# Altium PCB PCB1修正取消布线.PcbDoc
Units mm, origin at the board's own origin, x right, y up, seen from the top; angles counter-clockwise.
Board outline 150 x 150 mm, 2 copper layers (Top Layer, Bottom Layer); 93 components, 93 nets, 298 pads, 31 vias.
Unrouted connection lines stored in the file: 6.
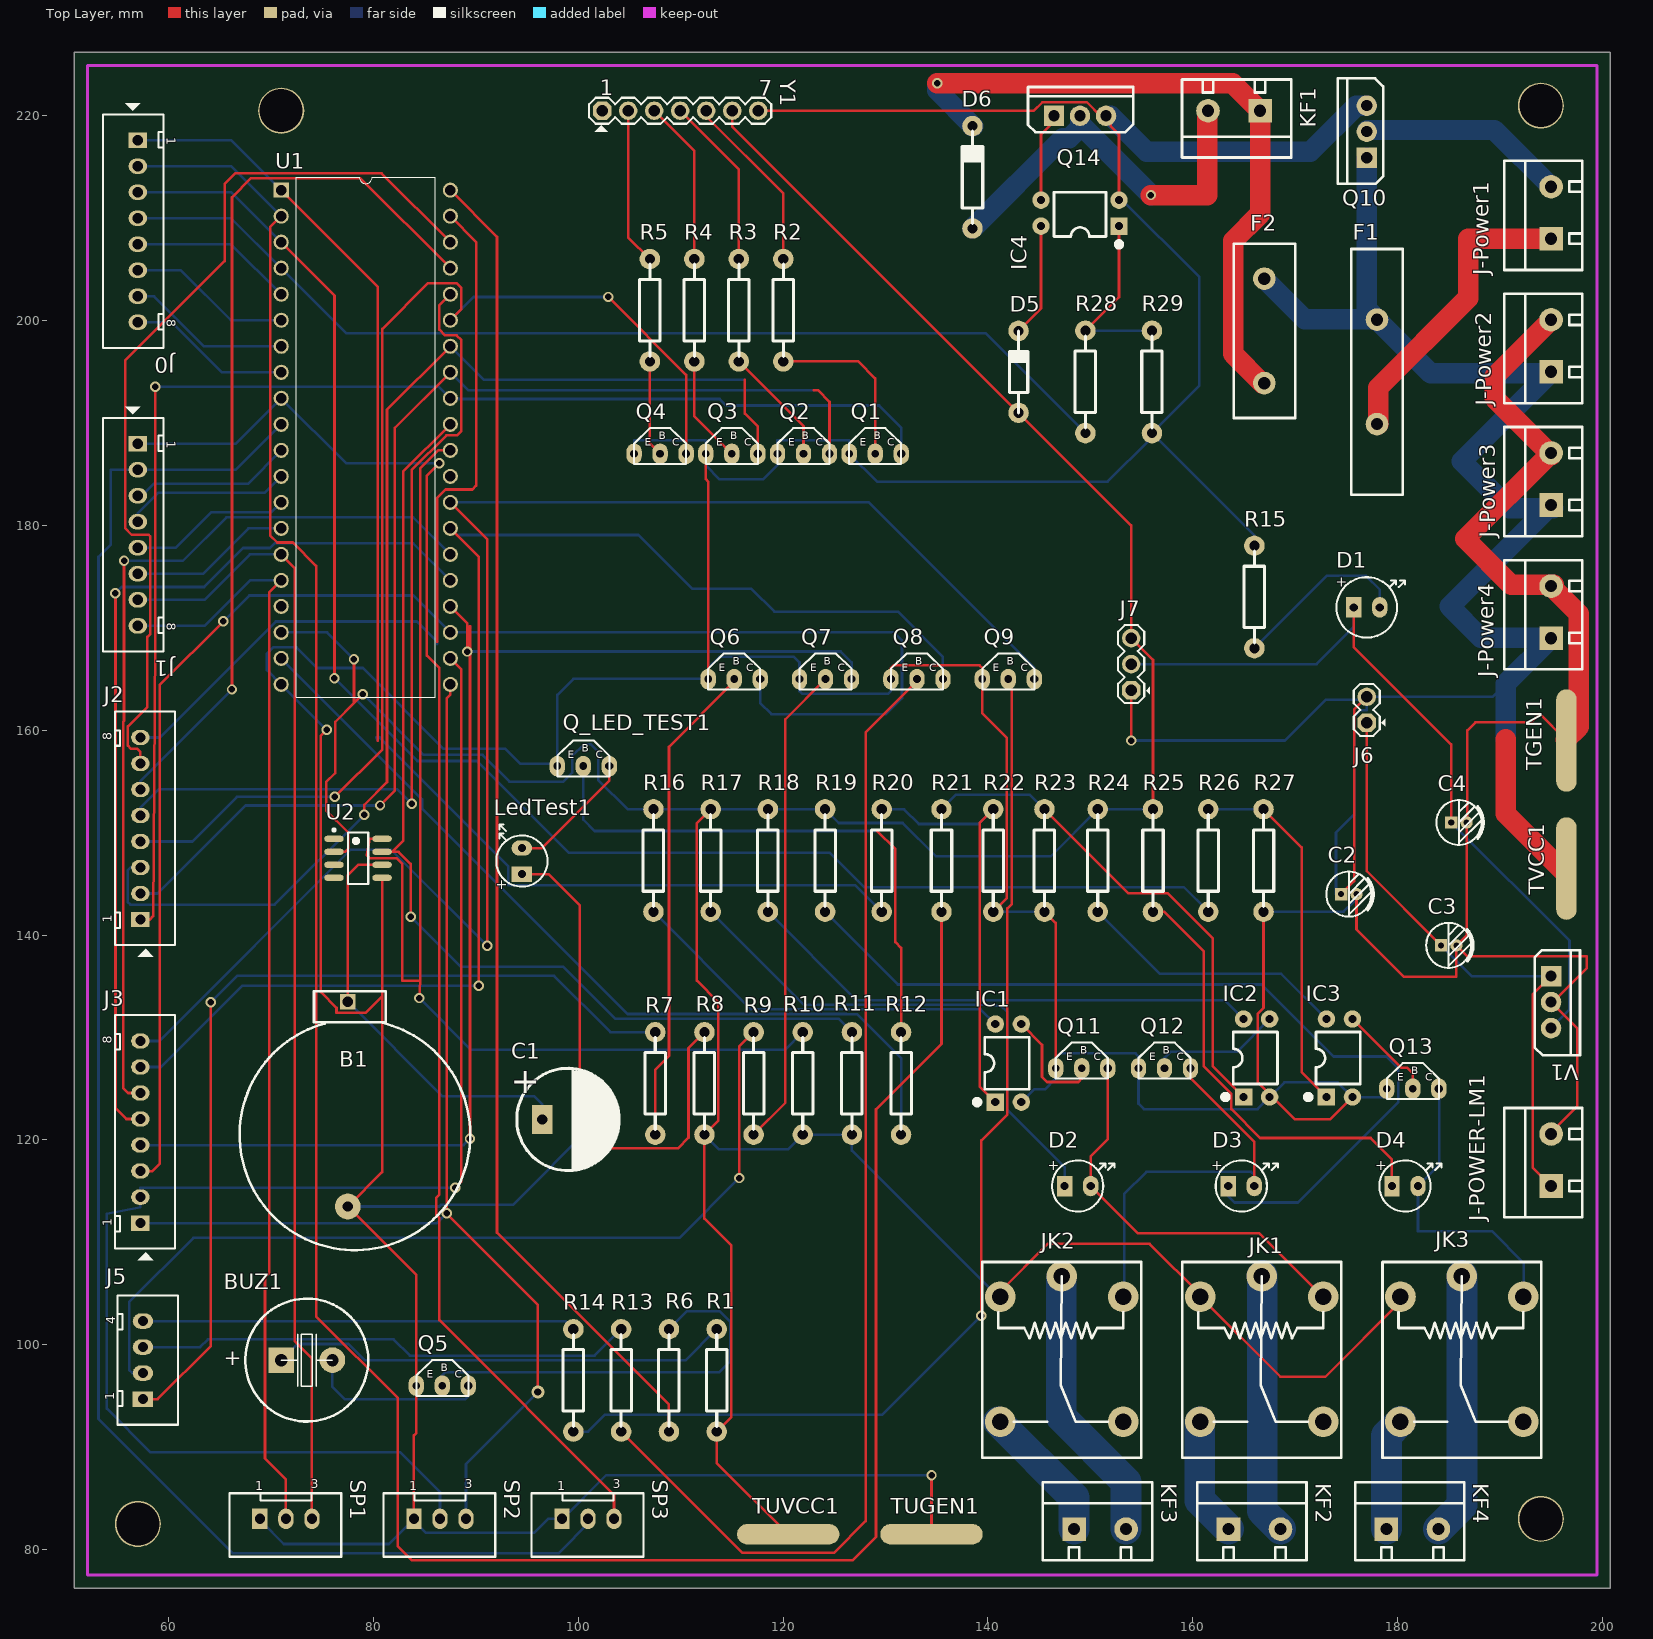
[diagram p0: Top Layer view]
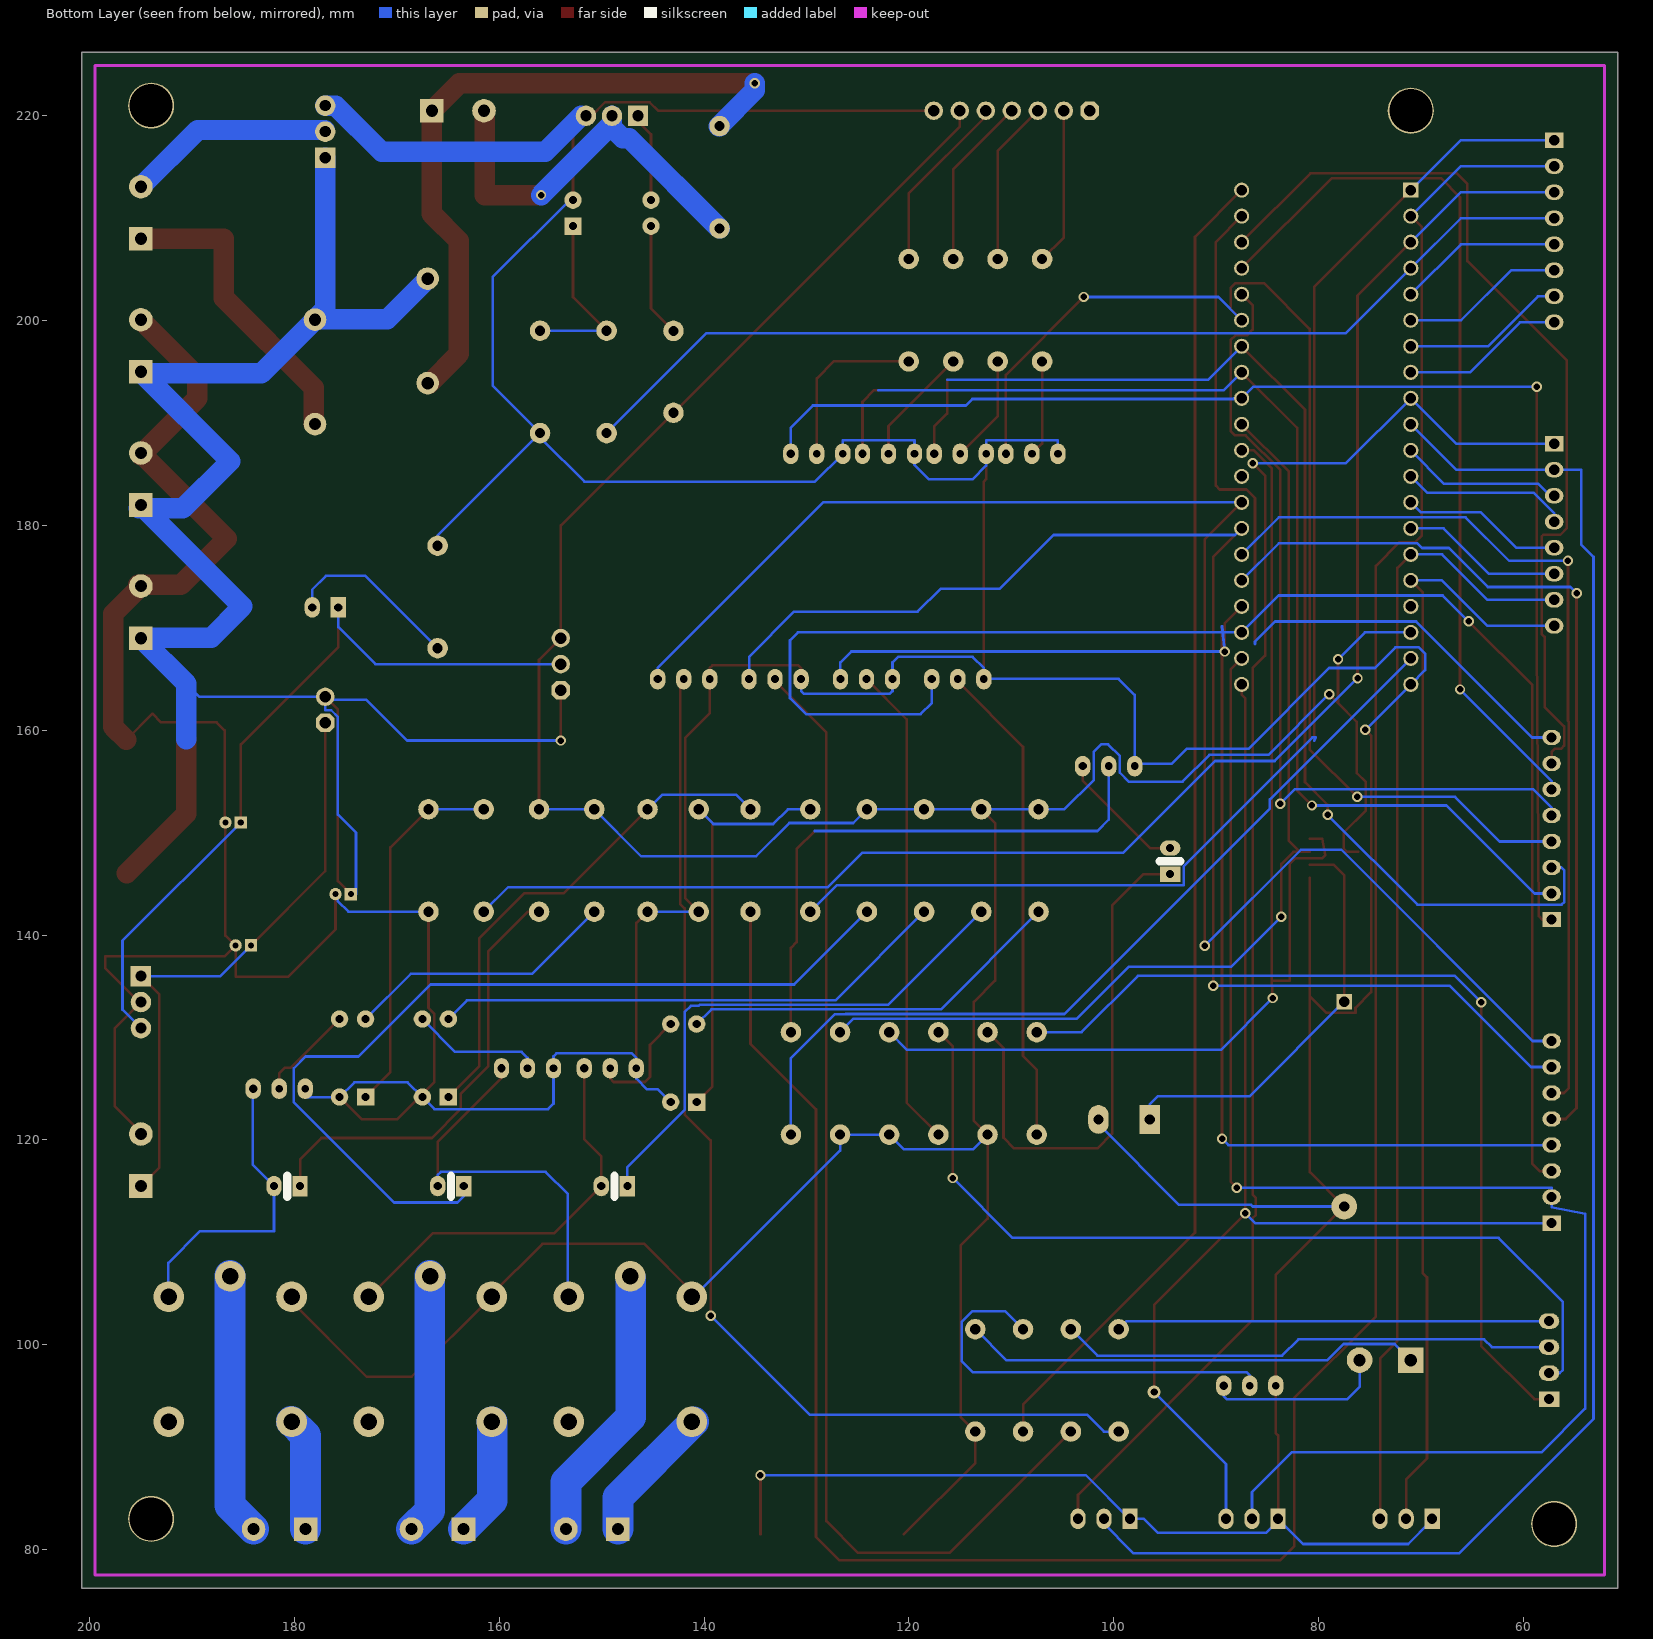
[diagram p1: Bottom Layer view, seen from below]

## Layer stack, top to bottom
Top Solder: solder mask 0.0102, Solder Resist, Dk 3.5
Top Layer: signal copper 0.0356
Dielectric 1: dielectric 0.32, FR-4, Dk 4.8
Bottom Layer: signal copper 0.0356
Bottom Solder: solder mask 0.0102, Solder Resist, Dk 3.5

## Board outline
50.8,76.2 200.8,76.2 200.8,226.2 50.8,226.2

## Design rules (kind name [scope] priority, off if disabled: settings)
Clearance [All] p1: gap=0.2
Height [All] p1: minheight=0 maxheight=55.4 prefheight=12.7
HoleSize [All] p1: absolutevalues=TRUE maxlimit=2.54 minlimit=0.4 maxpercent=80.000 minpercent=20.000
PolygonConnect [All] p1: connectstyle=Relief reliefconductorwidth=0.254 reliefentries=4 polygonreliefangle="90 Angle" airgapwidth=0.254
RoutingVias [All] p1: holewidth=0.635 width=1.016 viastyle="Through Hole" minholewidth=0.711 minwidth=1.27 maxholewidth=0.711 maxwidth=1.27
SMDNeckDown [All] p1: percent=50.000
SolderMaskExpansion [All] p1: expansion=0.102
Width VCC [InNetClass('VCC')] p1 off: maxlimit=3 minlimit=3 preferedwidth=3 minimp=50.000000 maximp=50.000000 favimp=50.000000
Width [All] p2: maxlimit=3 minlimit=0.254 preferedwidth=0.254 minimp=50.000000 maximp=50.000000 favimp=50.000000
28 further rules are at their usual default settings.

## Classes and differential pairs
net class P3BUS[0..7]: P3BUS0 P3BUS1 P3BUS2 P3BUS3 P3BUS4 P3BUS5 P3BUS6 P3BUS7
net class P2BUS[0..7]: P2BUS0 P2BUS1 P2BUS2 P2BUS3 P2BUS4 P2BUS5 P2BUS6 P2BUS7
net class P1BUS[0..7]: P1BUS0 P1BUS1 P1BUS2 P1BUS3 P1BUS4 P1BUS5 P1BUS6 P1BUS7
net class P0BUS[0..7]: P0BUS0 P0BUS1 P0BUS2 P0BUS3 P0BUS4 P0BUS5 P0BUS6 P0BUS7
component class U_电源: C2 C3 C4 D1 F1 J6 J7 J-Power1 J-Power2 J-Power3 J-Power4 J-POWER-LM1 Q10 R15 TGEN1 TVCC1 V1
component class U_电机控制盒: D5 D6 F2 IC4 KF1 Q14 R28 R29
component class U_功率开关: D2 D3 D4 IC1 IC2 IC3 JK1 JK2 JK3 KF2 KF3 KF4 Q11 Q12 Q13 R16 R17 R18 R19 R20 R21 R22 R23 R24 R25 R26 R27
component class U_STC15_U1: B1 BUZ1 C1 J0 J1 J2 J3 J5 LedTest1 Q1 Q2 Q3 Q4 Q5 Q6 Q7 Q8 Q9 Q_LED_TEST1 R1 R2 R3 R4 R5 R6 R7 R8 R9 R10 R11 R12 R13 R14 SP1 SP2 SP3 TUGEN1 TUVCC1 U1 U2 Y1

## Components (designator, comment, footprint, x,y, rotation, side; value= is the part's Value field where it differs from the comment)
B1 "CR2032" CR2032座 78.2,120.5 r90 top
BUZ1 "SD1209T5-A1" BUZ5-12-0R5-9MM 73.5,98.5 r0 top
C1 "104" CE5-6R5X5-1mm 99,122 r0 top
C2 "0.1uf" "CAP 1.5*4*8" 175.25,144 r0 top
C3 "0.33uf" "CAP 1.5*4*8" 185,139 r0 top
C4 "0.1uf" "CAP 1.5*4*8" 186,151 r0 top
D1 "333-2SYGD/S530-E2" LED2-D5R9X8R7 177,172 r0 top
D2 "C535A WJN CU0V0231" LED2-D5X5 148.77,115.5 r0 top
D3 "C535A WJN CU0V0231" LED2-D5X5 164.75,115.5 r0 top
D4 "C535A WJN CU0V0231" LED2-D5X5 180.73,115.5 r0 top
D5 "1N457" DO-35 143,191 r90 top
D6 "1N4007-E3/73" DO-41 138.5,209 r90 top
F1 "FUSE" FUSE-24R1X3RX29R7-TH 178,195 r90 top
F2 "R30-600" FUSE-16R5X3RX24R9-TH 167,199 r90 top
IC1 "817" DIP4-300 142,127.5 r90 top
IC2 "817" DIP4-300 166.249,128 r90 top
IC3 "817" DIP4-300 174.332,128 r90 top
IC4 "817" DIP4-300 149,210.5 r180 top
J0 "W7810811120AB" XH8P-2R54-TH 57,208.73 r270 top
J1 "W7810811120AB" XH8P-2R54-TH 57,179.089 r270 top
J2 "W7810811120AB" XH8P-2R54-TH 57.25,150.411 r90 top
J3 "W7810811120AB" XH8P-2R54-TH 57.25,120.77 r90 top
J5 "W7810411120AB" XH4P-2R54-TH 57.5,98.5 r90 top
J6 "PAS1251-0201A01B1BA" CON2P-2R54-TH 177,162 r90 top
J7 "PAS1251-0301A01B1BA" CON3P-2R54-TH 154,166.46 r90 top
J-Power1 "KF301-5.08-2p" KF301-5.0-2P 195,213.08 r90 top
J-Power2 "KF301-5.08-2p" KF301-5.0-2P 195,200.08 r90 top
J-Power3 "KF301-5.08-2p" KF301-5.0-2P 195,187.08 r90 top
J-Power4 "KF301-5.08-2p" KF301-5.0-2P 195,174.08 r90 top
J-POWER-LM1 "KF301-5.08-2p" KF301-5.0-2P 195,120.58 r90 top
JK1 "SRD-05VDC-SL-C" SRD-C_B 172.751,104.681 r270 top
JK2 "SRD-05VDC-SL-C" SRD-C_B 153.213,104.681 r270 top
JK3 "SRD-05VDC-SL-C" SRD-C_B 192.289,104.681 r270 top
KF1 "KF301-5.08-2p" KF301-5.0-2P 161.5,220.5 r180 top
KF2 "KF301-5.08-2p" KF301-5.0-2P 168.58,82 r0 top
KF3 "KF301-5.08-2p" KF301-5.0-2P 153.5,82 r0 top
KF4 "KF301-5.08-2p" KF301-5.0-2P 184,82 r0 top
LedTest1 "333-2SUBD/S400-A4" LED2-D5X5 94.5,147.23 r90 top
Q1 "2N3904" TO-92-3-EBC 129,187 r0 top
Q2 "2N3904" TO-92-3-EBC 122,187 r0 top
Q3 "2N3904" TO-92-3-EBC 115,187 r0 top
Q4 "2N3904" TO-92-3-EBC 108,187 r0 top
Q5 "2N3904" TO-92-3-EBC 86.73,96 r0 top
Q6 "2N3904" TO-92-3-EBC 115.23,165 r0 top
Q7 "2N3904" TO-92-3-EBC 124.153,165 r0 top
Q8 "2N3904" TO-92-3-EBC 133.077,165 r0 top
Q9 "2N3904" TO-92-3-EBC 142,165 r0 top
Q10 "IRF540" TO220A 177,218.46 r90 top
Q11 "2N3904" TO-92-3-EBC 149.168,127 r0 top
Q12 "2N3904" TO-92-3-EBC 157.251,127 r0 top
Q13 "2N3904" TO-92-3-EBC 181.5,125 r0 top
Q14 "IRFZ44" TO220A 149,220 r0 top
Q_LED_TEST1 "2N3904" TO-92-3-EBC 100.5,156.5 r0 top
R1 "166" RY0R25W 113.5,96.5 r90 top
R2 "100R" RY0R25W 120,201 r90 top
R3 "100R" RY0R25W 115.658,201 r90 top
R4 "100R" RY0R25W 111.315,201 r90 top
R5 "100R" RY0R25W 106.973,201 r90 top
R6 "1K" RY0R25W 108.833,96.5 r90 top
R7 "5.1K" RY0R25W 107.5,125.5 r90 top
R8 "250" RY0R25W 112.3,125.5 r90 top
R9 "5.1K" RY0R25W 117.1,125.5 r90 top
R10 "1.2k" RY0R25W 121.9,125.5 r90 top
R11 "1.2k" RY0R25W 126.7,125.5 r90 top
R12 "1.2k" RY0R25W 131.5,125.5 r90 top
R13 "5.1K" RY0R25W 104.167,96.5 r90 top
R14 "5.1K" RY0R25W 99.5,96.5 r90 top
R15 "250" RY0R25W 166,173 r90 top
R16 "1.2K" RY0R25W 107.319,147.264 r90 top
R17 "300" RY0R25W 112.907,147.264 r90 top
R18 "1.2K" RY0R25W 118.495,147.264 r90 top
R19 "300" RY0R25W 124.083,147.264 r90 top
R20 "1K" RY0R25W 129.607,147.264 r90 top
R21 "1K" RY0R25W 135.449,147.264 r90 top
R22 "400" RY0R25W 140.5,147.264 r90 top
R23 "400" RY0R25W 145.5,147.264 r90 top
R24 "1.2K" RY0R25W 150.702,147.264 r90 top
R25 "300" RY0R25W 156.1,147.264 r90 top
R26 "1K" RY0R25W 161.497,147.264 r90 top
R27 "400" RY0R25W 166.895,147.264 r90 top
R28 "1k" RY0R25W 149.5,194 r90 top
R29 "400" RY0R25W 156,194 r90 top
SP1 "" XH3P-2R54-TH 71.46,83 r0 top
SP2 "" XH3P-2R54-TH 86.5,83 r0 top
SP3 "" XH3P-2R54-TH 100.96,83 r0 top
TGEN1 "T？" 铺铜条#1 197.516,148.459 r90 top
TUGEN1 "T？" 铺铜条#2 135.516,70.959 r90 top
TUVCC1 "T？" 铺铜条#2 121.516,70.959 r90 top
TVCC1 "T？" 铺铜条#1 197.516,135.959 r90 top
U1 "STC15F2K60S2_PDIP40" DIP40 71,212.74 r0 top
U2 "DS3231MZ+" S8MK+1_L 78.5,147.5 r0 top
V1 "7805" TO220A 195,133.46 r270 top
Y1 "315接收模块" CON7P-2R54-TH 109.96,220.5 r0 top

## Footprints (in the part's own frame and the unit in brackets; to place one, negate y for a bottom-side part, rotate by r counter-clockwise, add the part's x,y. Pads: shape width x height; smd on the part's side, far side on the other; paste and mask are expansions set on the pad)
BUZ5-12-0R5-9MM [mm]
  rect 2.5x2.5 hole 1.2: 1(-2.5,0)
  round 2.5 hole 1.2: 2(2.5,0)
  silkscreen extent -6,-6 6,6, body extent -5.99,-6 6,6, height 9
"CAP 1.5*4*8" [mm] "脚距1.5mm直径4mm高度8mm"
  rect 1.2x1.2 hole 0.6: 1(-0.75,0)
  round 1.2 hole 0.6: 2(0.75,0)
  silkscreen extent -2.2,-2.2 2.41,2.2, body extent -2,-2 2.02,2, height 8.04
CE5-6R5X5-1mm [mm]
  rect 2x2.8 hole 1: 1(-2.5,0)
  oval 2x2.8 hole 1: 2(2.5,0)
  silkscreen extent -5,-5 5,5, body extent -4.99,-4.9 5,5.1, height 10
CON2P-2R54-TH [mm]
  oct 1.8x1.8 hole 1.1: 1(-1.27,0)
  round 1.8 hole 1.1: 2(1.27,0)
  silkscreen extent -2.54,-1.8 2.54,1.27, body extent -2.54,-1.27 2.54,1.27, height 9.39
CON3P-2R54-TH [mm]
  oct 1.8x1.8 hole 1.1: 1(-2.54,0)
  round 1.8 hole 1.1: 2(0,0) 3(2.54,0)
  silkscreen extent -3.81,-1.83 3.81,1.27, body extent -3.78,-1.27 3.84,1.27, height 1.53
CON7P-2R54-TH [mm]
  oct 1.8x1.8 hole 1.1: 1(-7.62,0)
  round 1.8 hole 1.1: 2(-5.08,0) 3(-2.54,0) 4(0,0) 5(2.54,0) 6(5.08,0) 7(7.62,0)
  silkscreen extent -8.89,-2.04 8.89,1.27, body extent -8.86,-1.27 8.92,1.27, height 8.97
CR2032座 [mm]
  rect 1.524x1.524 hole 1: 0(13,0.7)
  round 2.524 hole 1: 1(-7,0.7)
  silkscreen extent -11.26,-11.26 14,11.26
DIP4-300 [mm] "4.6*7.6*3.8(长宽高）"
  rect 1.7x1.7 hole 0.8: 1(-3.81,1.27)
  round 1.7 hole 0.8: 2(-3.81,-1.27) 3(3.81,-1.27) 4(3.81,1.27)
  silkscreen extent -4.06,-2.03 2.54,3.3, body extent -3.93,-2.29 3.94,2.29, height 4.5
DIP40 [mil]
  rect 58x58 hole 40: 1(0,0)
  round 58 hole 40: 2(0,-100) 3(0,-200) 4(0,-300) 5(0,-400) 6(0,-500) 7(0,-600) 8(0,-700) 9(0,-800) 10(0,-900) 11(0,-1000) 12(0,-1100) 13(0,-1200) 14(0,-1300) 15(0,-1400) 16(0,-1500) 17(0,-1600) 18(0,-1700) 19(0,-1800) 20(0,-1900) 21(650,-1900) 22(650,-1800) 23(650,-1700) 24(650,-1600) 25(650,-1500) 26(650,-1400) 27(650,-1300) 28(650,-1200) 29(650,-1100) 30(650,-1000) 31(650,-900) 32(650,-800) 33(650,-700) 34(650,-600) 35(650,-500) 36(650,-400) 37(650,-300) 38(650,-200) 39(650,-100) 40(650,0)
  silkscreen extent 58,-1950 592,50
DO-35 [mm]
  round 2 hole 1: 1(0,0) 2(8,0)
  silkscreen extent 0,-0.9 8,0.9, body extent -0.3,-0.97 8.3,1.02, height 1.99
DO-41 [mm]
  round 2 hole 1: 1(0,0) 2(10,0)
  silkscreen extent 0.5,-1 9.5,1, body extent -0.53,-1.3 10.53,1.3, height 2.8
FUSE-16R5X3RX24R9-TH [mm]
  round 2.2 hole 1.2: 1(-5.1,0) 2(5.1,0)
  silkscreen extent -8.5,-3 8.5,3, body extent -10.12,-1.8 11.18,1.3, height 25.65
FUSE-24R1X3RX29R7-TH [mm]
  round 2.2 hole 1.2: 1(-5.1,0) 2(5.1,0)
  silkscreen extent -12,-2.5 12,2.5, body extent -10.76,-1.45 10.54,1.65, height 25.65
KF301-5.0-2P [mm] "可拼接端子/6A"
  rect 2.3x2.3 hole 1.2: 1(-5.08,0)
  round 2.3 hole 1.2: 2(0,0)
  silkscreen extent -8.13,-3.05 2.54,4.57, body extent -7.95,-3 2.55,4.6, height 10.05
LED2-D5R9X8R7 [mm]
  rect 1.5x2 hole 0.8: 1(-1.27,0)
  oval 1.5x2 hole 0.8: 2(1.27,0)
  silkscreen extent -2.95,-2.95 3.75,2.95, body extent -3,-3 2.88,2.89, height 8.7
LED2-D5X5 [mm]
  rect 1.5x2 hole 0.8: 1(-1.27,0)
  oval 1.5x2 hole 0.8: 2(1.27,0)
  silkscreen extent -2.5,-2.5 3.59,2.5, body extent -3,-3 2.98,2.99, height 14.5
RY0R25W [mm]
  round 2 hole 1: 1(-4.98,-0.027) 2(5.02,-0.027)
  silkscreen extent -4.48,-1.03 4.52,0.97, body extent -5.38,-1.11 5.38,1.2, height 2.43
S8MK+1_L [mm] "SOIC, 8-Leads, Body 4.9x3.9mm, Pitch 1.27mm, IPC High Density"
  oval 1.9x0.6 smd: 1(-2.35,1.905) 2(-2.35,0.635) 3(-2.35,-0.635) 4(-2.35,-1.905) 5(2.35,-1.905) 6(2.35,-0.635) 7(2.35,0.635) 8(2.35,1.905)
  silkscreen extent -2.47,-2.5 1,2.88, body extent -2,-2.5 2,2.5, height 1.75
SRD-C_B [mm] "单刀双投"
  round 3 hole 1.6: 1(0,0) 2(0,-12) 3(-2,-6) 4(12.2,0) 5(12.2,-12)
  silkscreen extent -3.4,-13.75 15.7,1.75, body extent -3.4,-13.75 15.7,1.75, height 15.6
TO220A [mm] "220，3脚晶体管"
  rect 2x2 hole 1.1: 1(-2.54,0)
  round 2 hole 1.1: 2(0,0) 3(2.54,0)
  silkscreen extent -5.08,-1.6 5.21,2.82, body extent -5.15,-1.53 5.15,2.9, height 18.5
TO-92-3-EBC [mm]
  oval 1.5x2 hole 0.762: B(0,0) E(-2.54,0)
  oval 1.5x2 hole 0.8: C(2.54,0)
  silkscreen extent -2.54,-1 2.54,2.5, body extent -3.1,-1.02 3.07,3.06, height 8.5
XH3P-2R54-TH [mm]
  rect 1.5x2 hole 1: 1(-2.54,0)
  oval 1.5x2 hole 1: 2(0,0) 3(2.54,0)
  silkscreen extent -5.5,-3.7 5.4,2.5, body extent -5.31,-3.6 5.29,2.4, height 7.5
XH4P-2R54-TH [mm]
  rect 1.5x2 hole 1: 1(-3.81,0)
  oval 1.5x2 hole 1: 2(-1.27,0) 3(1.27,0) 4(3.81,0)
  silkscreen extent -6.31,-3.4 6.29,2.5, body extent -6.47,-3.4 6.63,2.6, height 7.5
XH8P-2R54-TH [mm]
  rect 1.5x1.8 hole 1: 1(-8.89,0)
  oval 1.5x1.8 hole 1: 2(-6.35,0) 3(-3.81,0) 4(-1.27,0) 5(1.27,0) 6(3.81,0) 7(6.35,0) 8(8.89,0)
  silkscreen extent -12.5,-3.4 11.41,2.5, body extent -11.56,-3.6 11.54,2.4, height 7.5
铺铜条#1 [mm]
  oval 10x2 smd: 1(10.541,1.016)
铺铜条#2 [mm]
  oval 2x10 smd: 1(10.541,1.016)

## Part data
BUZ1: library part 102BA-00004OD.01, "DIP,12x9mm,额定电压DC5V,频率2048Hz,黑色,间距5mm"
C1 C2 C3 C4: library part 102CB-00002OD.01, "DIP,电容量681pf,额定电压2000V,偏差±10%,6.5X5mm"
D1: library part 102DL-00010CH.01, "DIP,封装/间距直径5/2.54mm,额定电压2V,亮度普亮,绿色"
D2 D3 D4: library part 102DL-00002DG.01, "DIP,封装/间距直径5/2.54mm,额定电压3.2V,亮度高亮,白色"
D5: library part 102DG-00002AI.01, "DIP,D0-35,额定电压70V,电流200mA"
D6: library part 102DG-00002BS.01, "DIP,DO-41,额定电压1000V,电流1A"
F1: library part 102FP-00037BI.01, "DIP,24.1x29.7x3.0mm,额定电压30V,额定电流9A,触发电流18A,中速断"
F2: library part 102FP-00034BI.01, "DIP,16.5x24.9x3.0mm,额定电压30V,额定电流6A,触发电流12A,中速断"
IC1 IC2 IC3 IC4: "线性光耦"
J0 J1 J2 J3: library part 102NB-00026CY.01, "DIP,座子,封装脚距2.54mm,180度,1x8PIN,塑高/针长7.0/3.40mm,白色"
J5: library part 102NB-00025CY.01, "DIP,座子,封装脚距2.54mm,180度,1x4PIN,塑高/针长7.0/3.40mm,白色"
J6: library part 102NL-00005DJ.01, "DIP,封装脚距2.54mm,180度,1x2PIN,上针/下针6.0/3.0mm,黑色"
J7: library part 102NL-00001DJ.01, "DIP,封装脚距2.54mm,180度,1x3PIN,黑色"
J-Power1 J-Power2 J-Power3 J-Power4 J-POWER-LM1 KF1 KF2 KF3 KF4: library part KF301
JK1 JK2 JK3: "5V一组转换"
LedTest1: library part 102DL-00029CH.01, "DIP,封装/间距直径5/2.54mm,额定电压3.3V,亮度高亮,蓝色"
Q1 Q2 Q3 Q4 Q5 Q6 Q7 Q8 Q9 Q11 Q12 Q13 Q_LED_TEST1: library part 102GN-00009BA.01, "DIP,封装形式TO-92-3,耐压值40V,额定电流200mA,耗散功率625mW"
Q10 Q14: library part IRF840, "N沟场效应管"
R1 R6: library part 102RO-00079BW.01, "DIP,阻值1K,精度±5%,9.0x3.3mm,额定功率1/2W"
R2 R3 R4 R5: library part 102RO-00040BS.01, "DIP,阻值100R,精度±1%,6.1x2.29mm,额定功率1/4W"
R7 R9 R13 R14: library part 102RO-00048BS.01, "DIP,阻值5.1K,精度±1%,6.2x2.29mm,额定功率1/4W"
R8 R10 R11 R12: library part 102RO-00036BS.01, "DIP,阻值8.2R,精度±1%,AXIAL0.4,额定功率1/2W"
R15: library part 102RO-00087BS.01, "DIP,阻值500R,精度±0.1%,4.75x1.65mm,额定功率1/4W"
R16 R17 R18 R19 R20 R21 R22 R23 R24 R25 R26 R27: library part 102RO-00085BW.01, "DIP,阻值1K,精度±0.1%,AXIAL0.4,额定功率1/4W"
R28 R29: library part 102RO-00018BW.01, "DIP,阻值1M,精度±1%,AXIAL0.4,额定功率1/4W"
SP1 SP2 SP3: library part 102NB-00017CY.01, "DIP,座子,封装脚距2.54mm,180度,1x3PIN,塑高/针长7.0/3.40mm,白色"
TGEN1 TUGEN1 TUVCC1 TVCC1: library part 铺铜条, "2mm*20的铜条用于焊接"
U2: "+/-5ppm, MEMS based Real-Time Clock, I2C Interface, 8-Pin SO, -40 to 85 degC, Pb-Free"
V1: library part 78xx, "线性稳压芯片"
Y1: library part 102NL-00032BV.01, "DIP,封装脚距2.54mm,180度,1x7PIN,黑色"

## Free pads (board coordinates)
  round 4.5 hole 4.2 unplated: 0(57,82.5) 1(71,220.5) 2(194,221) 3(194,83)

## Via types
v1: diameter 1.016, hole 0.635, Top Layer to Bottom Layer, 30 vias
v2: diameter 1.27, hole 0.711, Top Layer to Bottom Layer, 1 vias

## Nets (pads, with @x,y where several pads share a name; then routed paths per layer and width w, separated by ;. In a path a pad name is that pad's centre, name@x,y a point inside that pad or via, vN(x,y) a via of type N, cw(c..) or ccw(c..) an arc to the next point about the centre after c; other vN are vias at no path point)
CLOCK_CLO: R10.2 U1.30 U2.8 | length 115.5
  Top Layer w0.254: U2.8 79.657,149.405 79.35,147.828 79.68,147.498 82.296,147.498 82.807,146.987 82.807,135.531 84.591,135.531 ; v1(84.48,133.858) 84.591,135.531 ; U1.30 86.324,187.34 84.591,185.607 84.591,135.531
  Bottom Layer w0.254: v1(84.48,133.858) 89.535,128.803 120.21,128.803 R10.2
CLOCK_IO: R11.2 U1.31 U2.7 | length 100.3
  Top Layer w0.254: U2.7 81.841,148.135 ; v1(83.642,141.808) 83.642,146.941 82.448,148.135 81.841,148.135 ; U1.31 82.909,185.279 82.909,149.203 81.841,148.135
  Bottom Layer w0.254: v1(83.642,141.808) 88.544,136.906 98.552,136.906 103.611,131.847 125.4,131.847 R11.2
GND: B1.1 C1.2 C2.2 C3.2 C4.2 IC1.2 IC2.2 IC3.2 IC4.2 J-Power2.2 J-Power3.2 J-Power4.2 J-POWER-LM1.2 Q1.E Q2.E Q3.E Q4.E Q5.E Q6.E Q7.E Q8.E Q9.E Q10.3 Q11.E Q12.E Q13.E Q14.3 Q_LED_TEST1.E R15.2 R22.1 R23.1 R27.1 R29.1 SP1.1 SP2.1 SP3.1 TGEN1.1 TUGEN1.1 U1.20 U2.5 V1.2 Y1.7 | length 775.6
  Top Layer w0.254: v1(75.438,160.042) 74.873,159.477 74.873,134.423 76.403,132.893 76.403,132.41 79.248,132.41 80.848,134.01 ; U2.5 80.848,145.595 80.848,134.01 ; SP2.1 83.96,91.134 84.19,91.364 Q5.E 84.19,106.81 B1.1 80.848,116.848 80.848,134.01 ; Q3.E 112.46,184.517 112.69,184.287 Q6.E ; Y1.7 144.498,220.5 145.325,221.327 149.673,221.327 Q14.3@151,220 ; Q8.E 130.537,166.071 130.81,166.345 139.192,166.345 139.46,166.077 Q9.E 139.46,161.646 141.859,159.247 141.859,143.616 R22.1 ; TUGEN1.1 v1(134.5,87.256) ; R23.1 146.628,141.183 Q11.E ; Q14.3@152,220 152,219 152.81,218.19 IC4.2 ; R27.1 166.922,132.878 166.342,132.298 166.342,125.658 170,122 173.412,122 IC3.2 ; C2.2@175.997,143.84 175.997,140.564 180.645,135.915 185.75,135.915 C3.2 186.828,137.922 198.501,137.922 198.501,136.804 V1.2@195.078,133.382 ; C3.2@185.776,138.989 186.75,139.963 C4.2 ; C4.2@186.817,151.232 186.817,159.995 187.604,160.782 193.042,160.782 193.88,161.62 TGEN1.1@196.432,159.068 ; V1.2 V1.2@195.078,133.382 ; J-POWER-LM1.2@195.199,120.929 197.561,123.292 197.561,130.899 V1.2@195.078,133.382
  Top Layer w2: J-Power4.2 197.688,171.392 197.688,160.325 TGEN1.1@196.432,159.068 ; J-Power3.2 J-Power3.2@194.905,186.984 ; J-Power2.2 189.484,194.564 189.484,192.405 J-Power3.2@194.905,186.984 ; J-Power3.2@195.021,186.868 J-Power3.2@194.905,186.984 ; J-Power4.2@195.275,174.193 191.114,174.193 186.614,178.694 J-Power3.2@194.905,186.984
  Bottom Layer w0.254: SP1.1@69.063,82.728 71.247,80.543 81.503,80.543 SP2.1 SP2.1@83.96,82.816 ; v1(75.438,160.042) U1.20 69.596,165.884 69.596,167.488 70.206,168.097 72.492,168.097 74.507,166.082 78.978,166.082 86.868,158.191 92.888,158.191 94.336,156.743 Q_LED_TEST1.E@97.96,156.743 ; B1.1 86.436,113.5 86.6,113.664 93.624,113.664 101.5,121.541 C1.2 ; SP2.1@83.947,82.829 SP2.1@83.96,82.816 ; Q_LED_TEST1.E Q_LED_TEST1.E@97.96,156.743 ; SP3.1 97.072,83 95.707,81.636 85.141,81.636 SP2.1@83.96,82.816 ; SP3.1@98.425,82.956 102.725,87.256 v1(134.5,87.256) ; Q4.E 105.46,188.341 112.46,188.341 Q3.E 112.46,185.838 113.792,184.506 118.038,184.506 119.46,185.928 Q2.E 119.46,188.341 126.46,188.341 Q1.E 129.184,184.276 151.687,184.276 155.829,188.417 R29.1@155.829,188.951 ; Q6.E Q6.E@112.69,165.024 ; Q8.E 130.537,163.83 130.283,163.576 121.867,163.576 121.613,163.83 Q7.E 121.613,166.626 121.066,167.173 113.792,167.173 112.69,166.071 Q6.E@112.69,165.024 ; R22.1 R23.1 ; IC1.2 144.526,124.946 145.59,124.946 146.628,125.984 Q11.E 146.628,128.016 147.06,128.448 154.432,128.448 154.711,128.168 Q12.E 154.711,123.546 155.245,123.012 166.341,123.012 IC2.2 168.957,125.628 174.163,125.628 IC3.2 175.602,124.181 178.96,124.181 Q13.E ; IC4.2@153.01,211.887 160.655,204.241 160.655,193.648 R29.1 R29.1@156.179,188.868 ; R29.1@156.362,189.052 R29.1@156.179,188.868 ; R15.2 165.989,177.902 165.989,179.058 R29.1@156.179,188.868 ; R27.1 174.752,142.284 175.768,143.3 C2.2@175.768,143.662 ; C2.2@175.92,143.815 C2.2@175.768,143.662 ; C2.2 175.768,143.768 C2.2@175.768,143.662 ; Q_LED_TEST1.E@97.96,156.743 97.96,163.449 99.535,165.024 Q6.E@112.69,165.024
  Bottom Layer w2: Q14.3@152,220 151.994,220.015 155.524,216.484 171.501,216.484 175.997,220.98 176.98,220.98 Q10.3
NetB1_0: B1.0 C1.1 U2.6 | length 40.7
  Top Layer w0.254: B1.0 77.5,145.854 78.511,146.865 U2.6
  Bottom Layer w0.254: B1.0 86.718,124.282 95.662,124.282 96.5,123.444 C1.1
NetBUZ1_1: BUZ1.1 R1.2 | length 45.1
  Bottom Layer w0.254: BUZ1.1 72.577,100.077 77.572,100.077 79.173,98.476 110.483,98.476 R1.2
NetBUZ1_2: BUZ1.2 Q5.C | length 17.5
  Bottom Layer w0.254: BUZ1.2 76,95.882 77.216,94.666 88.94,94.666 89.27,94.996 Q5.C
NetC3_1: C3.1 J6.1 J-POWER-LM1.1 V1.1 | length 58.7
  Top Layer w0.254: J6.1 177,146.25 C3.1 ; J-POWER-LM1.1 193.192,117.308 193.192,134.192 V1.1
  Bottom Layer w0.254: C3.1 187.25,136 V1.1
NetD1_2: D1.2 R15.1 | length 17.5
  Bottom Layer w0.254: R15.1 173.089,175.082 176.924,175.082 178.27,173.736 D1.2
NetD2_1: D2.1 R17.1 | length 52.4
  Bottom Layer w0.254: R17.1 122.009,133.209 129.625,133.209 129.642,133.192 138.82,133.192 138.836,133.209 140.425,133.209 140.538,133.096 141.3,133.096 141.91,132.486 141.91,122.936 147.5,117.346 D2.1
NetD2_2: D2.2 JK1.1 Q11.C | length 39.5
  Top Layer w0.254: Q11.C 151.708,120.06 150.04,118.392 D2.2 154.669,110.871 166.522,110.871 JK1.1@172.847,104.546
NetD3_1: D3.1 R19.1 | length 87.5
  Bottom Layer w0.254: R19.1 131.215,135.179 166.726,135.179 173.761,128.143 178.918,128.143 180.061,127 180.061,123.673 170.282,113.894 164.084,113.894 163.48,114.498 D3.1
NetD3_2: D3.2 JK2.1 Q12.C | length 38.7
  Top Layer w0.254: Q12.C 159.791,126.047 166.02,119.819 D3.2
  Bottom Layer w0.254: JK2.1@153.314,104.927 153.314,114.732 155.473,116.891 165.715,116.891 166.02,116.586 D3.2
NetD4_1: D4.1 R25.1 | length 43.4
  Top Layer w0.254: R25.1 157.201,142.284 161.087,138.398 161.087,127.178 163.779,124.485 163.779,123.012 166.599,120.193 177.377,120.193 179.46,118.11 D4.1
NetD4_2: D4.2 JK3.1 Q13.C | length 29.5
  Bottom Layer w0.254: Q13.C 184.074,125.044 184.074,117.574 D4.2 182,111.091 189.239,111.091 192.329,108.001 JK3.1@192.329,104.978
NetD5_2: D5.2 IC4.4 | length 11.1
  Top Layer w0.254: D5.2 145.19,201.19 IC4.4
NetD6_1: D6.1 KF1.2 Q14.2 | length 39.1
  Top Layer w2: v1(155.931,212.268) 161.442,212.268 161.442,220.32 KF1.2@161.493,220.37
  Bottom Layer w2: D6.1 147.3,217.8 147.957,217.8 149.047,218.89 Q14.2@149.047,219.151 ; Q14.2 149,219.198 Q14.2@149.047,219.151 ; v1(155.931,212.268) Q14.2@149.047,219.151
NetD6_2: D6.2 F2.1 KF1.1 | length 67.2
  Top Layer w2: v1(135.052,223.164) 163.916,223.164 KF1.1 166.58,210.42 163.957,207.797 163.957,196.748 F2.1@166.853,193.853
  Bottom Layer w2: v1(135.052,223.164) 135.052,222.504 138.557,218.999 D6.2
NetF1_1: F1.1 J-Power1.1 | length 29.9
  Top Layer w2: F1.1@178.13,189.865 178.13,193.446 186.893,202.209 186.893,208 J-Power1.1
NetIC1_1: IC1.1 R20.2 R22.2 | length 41.9
  Top Layer w0.254: R22.2 139.192,150.949 139.192,125.228 IC1.1
  Bottom Layer w0.254: R20.2 131.826,152.284 133.259,150.851 139.094,150.851 R22.2
NetIC1_3: IC1.3 Q11.B | length 11.2
  Top Layer w0.254: IC1.3 145.288,129.292 145.288,126.162 145.796,125.654 148.844,125.654 149.168,125.978 Q11.B
NetIC1_4: IC1.4 R16.1 | length 37.9
  Bottom Layer w0.254: R16.1 116.875,132.755 139.285,132.755 IC1.4
NetIC2_1: IC2.1 R21.2 R23.2 | length 49.6
  Top Layer w0.254: R23.2 153.742,144.069 157.582,144.069 161.95,139.7 161.95,127.218 IC2.1
  Bottom Layer w0.254: R21.2 136.913,153.721 144.09,153.721 R23.2
NetIC2_3: IC2.3 Q12.B | length 12.9
  Bottom Layer w0.254: Q12.B 157.251,128.016 157.836,128.6 164.309,128.6 IC2.3
NetIC2_4: IC2.4 R18.1 | length 50.8
  Bottom Layer w0.254: R18.1 127.177,133.629 163.159,133.629 IC2.4
NetIC3_1: IC3.1 R26.2 R27.2 | length 36
  Top Layer w0.254: R27.2 170.637,148.569 170.637,126.614 IC3.1
  Bottom Layer w0.254: R26.2 R27.2
NetIC3_3: IC3.3 Q13.B | length 9.6
  Top Layer w0.254: IC3.3 180.361,127.051 180.941,127.051 181.5,126.492 Q13.B
NetIC3_4: IC3.4 R24.1 | length 26.7
  Bottom Layer w0.254: R24.1 156.793,136.22 168.651,136.22 IC3.4
NetIC4_1: IC4.1 R28.2 R29.2 | length 18.1
  Top Layer w0.254: R28.2 152.81,202.303 IC4.1
  Bottom Layer w0.254: R28.2 R29.2
NetIC4_3: IC4.3 Q14.1 | length 9
  Top Layer w0.254: IC4.3 145.19,218.19 Q14.1@147,220
NetJ5_1: J5.1 R7.2 | length 89.1
  Top Layer w0.254: J5.1 58.928,94.69 64.135,99.897 v1(64.135,133.452)
  Bottom Layer w0.254: v1(64.135,133.452) 66.7,136.017 97.638,136.017 103.135,130.52 R7.2
NetJ5_2: J5.2 R9.2 | length 87.5
  Top Layer w0.254: v1(115.722,116.281) 115.722,129.115 R9.2
  Bottom Layer w0.254: J5.2 56.465,97.23 56.159,97.536 56.159,104.165 62.433,110.439 109.88,110.439 v1(115.722,116.281)
NetJ5_3: J5.3 R13.2 | length 48.7
  Bottom Layer w0.254: J5.3 63.067,99.77 63.828,100.531 81.968,100.531 83.566,98.933 101.607,98.933 R13.2
NetJ5_4: J5.4 R14.2 | length 42.4
  Bottom Layer w0.254: J5.4 98.737,102.31 R14.2
NetJ-Power1_2: J-Power1.2 Q10.2 | length 20.3
  Bottom Layer w2: Q10.2@177.038,218.618 189.462,218.618 J-Power1.2
NetJK1_3: JK1.3 KF2.2 | length 25.6
  Bottom Layer w3: JK1.3 166.802,106.782 166.802,83.778 KF2.2
NetJK1_5: JK1.5 KF2.1 | length 11.7
  Bottom Layer w3: JK1.5 160.706,92.456 160.706,84.794 KF2.1
NetJK2_3: JK2.3 KF3.2 | length 27.1
  Bottom Layer w3: JK2.3@147.168,106.477 147.168,92.939 153.5,86.606 KF3.2
NetJK2_5: JK2.5 KF3.1 | length 13.5
  Bottom Layer w3: JK2.5@141.021,92.481 148.42,85.082 KF3.1
NetJK3_3: JK3.3 KF4.2 | length 25.8
  Bottom Layer w3: KF4.2 186.309,84.309 186.309,106.756 JK3.3
NetJK3_5: JK3.5 KF4.1 | length 11.2
  Bottom Layer w3: KF4.1 178.92,91.138 180.315,92.532 JK3.5
NetLedTest1_1: LedTest1.1 R8.2 | length 51.8
  Top Layer w0.254: LedTest1.1 97.079,145.96 100.152,142.887 100.152,120.625 101.6,119.177 109.728,119.177 110.769,120.218 110.769,128.962 R8.2
NetLedTest1_2: LedTest1.2 Q_LED_TEST1.C | length 12.7
  Top Layer w0.254: LedTest1.2 96.455,148.5 103.04,155.085 Q_LED_TEST1.C
NetQ1_B: Q1.B R2.1 | length 17
  Top Layer w0.254: R2.1 127.356,196.02 129,194.376 Q1.B
NetQ2_B: Q2.B R3.1 | length 11.6
  Top Layer w0.254: R3.1 122,189.705 Q2.B
NetQ3_B: Q3.B R4.1 | length 10.5
  Top Layer w0.254: R4.1 111.342,190.658 Q3.B
NetQ4_B: Q4.B R5.1 | length 9.4
  Top Layer w0.254: R5.1 107,188 Q4.B
NetQ5_B: Q5.B R6.2 | length 40.7
  Bottom Layer w0.254: Q5.B 86.73,97.028 87.035,97.333 113.792,97.333 114.859,98.4 114.859,102.21 113.792,103.276 110.617,103.276 R6.2
NetQ6_B: Q6.B R7.1 | length 47.7
  Top Layer w0.254: R7.1 107.527,126.856 108.864,128.194 108.864,158.379 115.23,164.744 Q6.B
NetQ7_B: Q7.B R9.1 | length 47.4
  Top Layer w0.254: R9.1 120.218,123.611 120.218,161.065 Q7.B
NetQ8_B: Q8.B R13.1 | length 114.4
  Top Layer w0.254: R13.1 116.034,79.68 124.968,79.68 128.067,82.779 128.067,159.786 133.077,164.796 Q8.B
NetQ9_B: Q9.B R14.1 | length 108
  Top Layer w0.254: v1(139.37,102.845) 139.37,119.964 141.91,122.504 141.91,142.596 142.316,143.002 142.316,164.428 142,164.744 Q9.B
  Bottom Layer w0.254: R14.1 100.969,91.52 102.616,93.167 129.692,93.167 v1(139.37,102.845)
NetQ_LED_TEST1_B: Q_LED_TEST1.B R12.2 | length 55
  Top Layer w0.254: 129.184,150.165 130.962,148.387 130.962,139.319 131.527,138.754 R12.2
  Bottom Layer w0.254: Q_LED_TEST1.B 100.5,151.265 101.6,150.165 129.184,150.165
NetR2_2: R2.2 Y1.5 | length 17.6
  Top Layer w0.254: Y1.5 112.5,219.961 120.027,212.434 R2.2
NetR3_2: R3.2 Y1.4 | length 16.9
  Top Layer w0.254: Y1.4 115.685,214.775 R3.2
NetR4_2: R4.2 Y1.3 | length 16.1
  Top Layer w0.254: Y1.3 111.342,216.578 R4.2
NetR5_2: R5.2 Y1.2 | length 15.4
  Top Layer w0.254: Y1.2 104.88,208.14 R5.2
NetR6_1: R6.1 U1.40 | length 130.1
  Top Layer w0.254: U1.40 92.075,208.175 92.075,110.947 108.86,94.162 R6.1
NetR12_1: R12.1 U1.19 | length 84.7
  Bottom Layer w0.254: U1.19 84.766,153.254 84.766,152.347 104.812,132.301 126.193,132.301 126.208,132.286 127.226,132.286 131.527,127.985 R12.1
P0BUS0: J0.1 R20.1 U1.1 | length 131.6
  Top Layer w0.254: U1.1 80.416,203.324 80.416,158.979
  Bottom Layer w0.254: J0.1 66.12,217.62 U1.1 ; 80.416,158.979 80.264,159.309 80.594,159.309 93.167,146.736 93.167,144.882 127.036,144.882 R20.1
P0BUS1: J0.2 R21.1 U1.2 | length 264.3
  Top Layer w0.254: U1.2 69.926,209.126 69.926,179.019 70.612,178.333 72.136,178.333 74.419,176.05 74.419,102.771 82.398,94.793 82.398,80.315 83.744,78.969 126.822,78.969 129.083,81.229 129.083,122.987 135.476,129.38 R21.1
  Bottom Layer w0.254: J0.2 66.12,215.08 U1.2
P0BUS2: J0.3 R26.1 U1.3 | length 155.5
  Top Layer w0.254: U1.3 76.2,202.46 v1(76.2,165.1)
  Bottom Layer w0.254: J0.3 66.12,212.54 U1.3 ; v1(76.2,165.1) 84.303,156.997 90.119,156.997 99.06,148.057 124.536,148.057 127.914,144.678 159.13,144.678 R26.1
P0BUS3: J0.4 R28.1 U1.4 | length 101.2
  Bottom Layer w0.254: J0.4 66.12,210 U1.4 77.34,198.78 139.767,198.78 R28.1
P0BUS4: J0.5 U1.5 | length 16
  Bottom Layer w0.254: J0.5 66.12,207.46 U1.5
P0BUS5: J0.6 U1.6 | length 16
  Bottom Layer w0.254: J0.6 61.196,204.92 66.076,200.04 U1.6
P0BUS6: J0.7 U1.7 | length 16
  Bottom Layer w0.254: J0.7 58.58,202.38 63.46,197.5 U1.7
P0BUS7: J0.8 U1.8 | length 16
  Bottom Layer w0.254: J0.8 60.332,199.84 65.212,194.96 U1.8
P1BUS0: J1.1 SP3.3 U1.9 | length 145.3
  Top Layer w0.254: v1(86.436,186.08) 85.23,184.875 85.23,167.28 86.436,166.075 86.436,114.656 86.127,114.347 86.127,112.684 86.436,112.375 86.436,102.413 103.5,85.349 SP3.3
  Bottom Layer w0.254: J1.1 66.559,187.979 U1.9 77.34,186.08 v1(86.436,186.08)
P1BUS1: J1.2 SP3.2 U1.10 | length 166.5
  Bottom Layer w0.254: U1.10 66.559,185.439 J1.2 54.362,185.439 54.362,178.143 53.162,176.943 53.162,92.761 66.294,79.629 98.069,79.629 SP3.2@101.219,82.779
P1BUS2: J1.3 U1.11 | length 15.8
  Bottom Layer w0.254: J1.3 57.365,182.899 58.539,184.074 67.734,184.074 U1.11
P1BUS3: J1.4 U1.12 | length 16.3
  Bottom Layer w0.254: J1.4 57,181.204 58.981,183.185 69.385,183.185 U1.12
P1BUS4: J1.5 U1.13 | length 15.8
  Bottom Layer w0.254: J1.5 60.7,177.819 64.186,181.305 70.045,181.305 U1.13
P1BUS5: J1.6 U1.14 | length 15.8
  Bottom Layer w0.254: J1.6 63.367,175.279 67.808,179.72 U1.14
P1BUS6: J1.7 SP1.3 U1.15 | length 111.3
  Top Layer w0.254: U1.15 72.314,175.866 72.314,100.355 74,98.669 SP1.3
  Bottom Layer w0.254: J1.7 63.494,172.739 67.935,177.18 U1.15
P1BUS7: J1.8 SP1.2 U1.16 | length 109
  Top Layer w0.254: U1.16 69.85,173.49 69.85,107.01 69.418,106.578 69.418,88.9 71.46,86.858 SP1.2
  Bottom Layer w0.254: J1.8 63.519,170.199 67.96,174.64 U1.16
P2BUS0: J2.1 Q1.C U1.32 | length 130.2
  Top Layer w0.254: J2.1 58.166,141.521 58.496,141.851 58.681,168.668 v1(58.681,193.548)
  Bottom Layer w0.254: v1(58.681,193.548) 86.382,193.548 U1.32 88.265,192.42 88.331,192.354 113.817,192.354 114.452,191.719 129.381,191.719 131.54,189.56 Q1.C
P2BUS1: J2.2 Q2.C U1.33 | length 115.4
  Top Layer w0.254: v1(80.648,152.657) 82.093,154.102 82.093,189.543 U1.33 ; 122.991,193.218 123.397,193.218 124.54,192.075 Q2.C
  Bottom Layer w0.254: J2.2 58.92,144.061 67.516,152.657 v1(80.648,152.657) ; U1.33 89.252,193.218 122.991,193.218
P2BUS2: J2.3 Q3.C U1.34 | length 118.4
  Top Layer w0.254: v1(79.121,151.74) 79.121,152.73 81.331,154.94 81.331,191.321 U1.34 ; 116.27,194.22 116.281,194.208 116.281,190.921 117.54,189.662 Q3.C
  Bottom Layer w0.254: J2.3 56.304,146.601 56.007,146.304 56.007,143.256 56.286,142.977 70.358,142.977 v1(79.121,151.74) ; U1.34 90.79,194.22 116.27,194.22
P2BUS3: J2.4 Q4.C U1.35 | length 116.6
  Top Layer w0.254: v1(76.225,153.492) 80.874,158.14 80.874,199.187 85.344,203.657 88.138,203.657 88.595,203.2 88.595,201.125 U1.35 ; v1(102.946,202.311) 110.54,194.717 Q4.C
  Bottom Layer w0.254: J2.4 62.323,149.141 66.675,153.492 v1(76.225,153.492) ; U1.35 89.781,202.311 v1(102.946,202.311)
P2BUS4: J2.5 U1.36 | length 83
  Top Layer w0.254: v1(83.744,152.832) 83.744,185.402 87.14,188.798 88.163,188.798 88.595,189.23 88.595,198.106 88.138,198.564 87.009,198.564 86.436,199.136 86.436,201.506 U1.36
  Bottom Layer w0.254: J2.5 57.25,152.449 59.055,154.254 82.321,154.254 v1(83.744,152.832)
P2BUS5: J2.6 U1.37 | length 87.3
  Top Layer w0.254: v1(66.192,163.984) 66.192,212.039 68.072,213.919 78.711,213.919 U1.37
  Bottom Layer w0.254: J2.6 57.25,155.042 v1(66.192,163.984)
P2BUS6: J2.7 U1.38 | length 89.6
  Top Layer w0.254: J2.7 57.25,157.863 56.896,158.217 56.302,158.217 56.023,158.496 56.023,160.376 57.937,162.29 57.937,169.113 58.227,169.403 58.227,178.918 58.049,179.095 56.388,179.095 55.753,179.73 55.753,196.088 65.481,205.816 65.481,213.36 66.497,214.376 80.794,214.376 U1.38
P2BUS7: J2.8 U1.39 | length 80.4
  Top Layer w0.254: 86.208,168.656 86.208,182.677 87.046,183.515 89.662,183.515 90.043,183.896 90.043,207.667 U1.39
  Bottom Layer w0.254: J2.8 59.148,159.301 70.471,170.624 84.24,170.624 86.208,168.656 86.208,168.427
P3BUS0: J3.1 SP2.3 U1.21 | length 118.3
  Top Layer w0.254: v1(87.147,112.827) 87.147,163.119 87.51,163.481 U1.21 ; v1@87.3,112.649 96.063,103.886 v2(96.063,95.377)
  Bottom Layer w0.254: J3.1 86.201,111.88 v1(87.147,112.827) ; SP2.3 89.04,88.354 v2(96.063,95.377)
P3BUS1: J3.2 SP2.2 U1.22 | length 145.9
  Top Layer w0.254: U1.22 88.595,165.935 88.595,115.926 v1(87.986,115.316)
  Bottom Layer w0.254: SP2.2 86.5,85.61 82.626,89.484 58.242,89.484 53.975,93.751 53.975,112.791 57.25,113.436 J3.2 57.25,115.316 v1(87.986,115.316)
P3BUS2: J3.3 Q6.C U1.23 | length 149.8
  Top Layer w0.254: J3.3 58.42,116.96 59.131,117.671 59.131,164.414 v1(65.354,170.637)
  Bottom Layer w0.254: v1(65.354,170.637) 67.881,173.164 83.906,173.164 U1.23 130.846,169.56 131.623,168.783 131.623,163.144 130.048,161.569 118.872,161.569 117.77,162.671 Q6.C
P3BUS3: J3.4 Q7.C U1.24 | length 129.7
  Top Layer w0.254: U1.24 89.179,170.431 v1(89.179,167.691) ; v1(89.433,120.117) 89.433,170.177
  Bottom Layer w0.254: J3.4 88.817,119.5 v1(89.433,120.117) ; 89.433,170.177 v1(89.179,167.691) 125.627,167.691 126.693,166.624 Q7.C
P3BUS4: J3.5 U1.25 | length 89.4
  Top Layer w0.254: v1(54.813,173.38) 54.813,123.107 55.88,122.04 J3.5
  Bottom Layer w0.254: v1(54.813,173.38) 55.423,173.99 63.475,173.99 67.285,177.8 69.901,177.8 70.358,178.257 83.893,178.257 U1.25
P3BUS5: J3.6 U1.26 | length 88.5
  Top Layer w0.254: v1(55.651,176.555) 55.651,160.914 55.569,160.832 55.569,125.051 56.039,124.58 J3.6
  Bottom Layer w0.254: v1(55.651,176.555) 61.392,176.555 65.634,180.797 83.893,180.797 U1.26
P3BUS6: J3.7 Q8.C U1.27 | length 137.6
  Top Layer w0.254: U1.27 90.272,176.958 v1(90.272,135.052)
  Bottom Layer w0.254: J3.7 59.251,127.12 67.183,135.052 v1(90.272,135.052) ; U1.27 88.16,179.07 105.893,179.07 111.15,173.812 116.916,173.812 119.151,171.577 131.216,171.577 135.617,167.177 Q8.C
P3BUS7: J3.8 Q9.C U1.28 | length 155.1
  Top Layer w0.254: U1.28 91.11,178.66 v1(91.11,138.963)
  Bottom Layer w0.254: J3.8 59.099,129.66 77.775,148.336 81.737,148.336 v1(91.11,138.963) ; U1.28 128.382,182.26 144.54,166.102 Q9.C
VCC: C2.1 F1.2 F2.2 J6.2 J7.1 J-Power2.1 J-Power3.1 J-Power4.1 Q10.1 TVCC1.1 | length 208.5
  Top Layer w0.254: v1(154,159) J7.1 ; C2.1 175.768,145.268 175.768,162.038 J6.2
  Top Layer w2: 190.551,159.106 190.576,159.106 190.576,151.841 TVCC1.1@196.367,146.05
  Bottom Layer w0.254: v1(154,159) 169,159 173,163 J6.2@177,163 ; C2.1@174,144 174,150 175.773,151.773 175.773,161.315 176.415,161.957 177,161.957 J6.2@177,163 ; 190.551,164.551 189.27,163.27 J6.2 J6.2@177,163
  Bottom Layer w2: F2.2 170.948,200.152 F1.2@178.079,200.152 ; Q10.1 177,201.155 F1.2@177.952,200.203 ; F1.2 183.257,194.843 J-Power2.1@194.843,194.843 ; 190.551,159.106 190.551,164.551 J-Power4.1 ; J-Power2.1@194.945,194.843 J-Power2.1@194.843,194.843 ; J-Power3.1 J-Power3.1@194.661,181.661 ; J-Power2.1 J-Power2.1@194.843,194.843 ; J-Power4.1@195.123,169.037 188.143,169.037 185.09,172.09 J-Power3.1@194.661,181.661 ; J-Power3.1@195.224,181.661 J-Power3.1@194.661,181.661 ; J-Power3.1@194.661,181.661 190.906,181.661 186.284,186.284 J-Power2.1@194.843,194.843
VCC5_LM7805: C4.1 D1.1 J7.2 V1.3 | length 75.7
  Top Layer w0.254: D1.1 175.73,168.135 185.25,158.615 C4.1
  Bottom Layer w0.254: J7.2 172.112,166.46 175.73,170.078 D1.1 ; C4.1 196.799,139.451 196.799,132.719 V1.3
VCC_S: D5.1 J7.3 JK1.2 JK2.2 JK3.2 R1.1 R8.1 R10.1 R11.1 R16.2 R17.2 R18.2 R19.2 R24.2 R25.2 TUVCC1.1 U1.18 U2.2 Y1.6 | length 372.9
  Top Layer w0.254: U2.2 77.216,148.135 77.546,148.465 77.546,150.012 75.387,152.171 75.387,154.94 76.276,155.829 76.276,160.833 78.105,162.662 ; v1(78.105,166.929) 78.105,162.662 ; v1(78.969,163.525) 78.105,162.662 ; R17.2 111.582,150.932 111.582,135.56 113.665,133.477 113.665,121.858 R8.1 112.327,112.319 114.96,109.685 114.96,92.953 R1.1 113.527,88.473 TUVCC1.1 ; Y1.6 115.04,218.96 D5.1 154,180 J7.3 156.127,166.873 R25.2 ; JK2.2 141.213,105.221 145.847,109.855 155.804,109.855 JK1.2@160.864,104.795 ; JK1.2 168.557,96.876 172.949,96.876 JK3.2@180.416,104.343
  Bottom Layer w0.254: U1.18 75.474,169.56 v1(78.105,166.929) ; v1(78.969,163.525) 84.887,157.607 90.678,157.607 93.294,154.991 98.552,154.991 99.416,155.854 99.416,157.48 100.559,158.623 101.244,158.623 101.956,157.912 101.956,155.169 104.84,152.284 R16.2 R17.2 R18.2 R19.2 125.442,150.952 131.674,150.952 134.925,147.701 146.146,147.701 R24.2 R25.2 ; R8.1 113.772,119.075 120.482,119.075 R10.1 R11.1 126.727,118.967 JK2.2@141.122,104.572
pads on no net: JK1.4 JK2.4 JK3.4 U1.17 U1.29 U2.1 U2.3 U2.4 Y1.1

## Keep-outs
Keep-Out Layer:
  lines w0.3: 52.1,77.5 52.1,224.9 199.5,224.9 199.5,77.5 52.1,77.5

## Text inside footprints (layer, text, board x,y; h text height)
BUZ1: Top Overlay "+" at 65.372,97.992 h1.52
C1: Top Overlay "+" at 93.412,124.54 h2.5
D1: Top Overlay "+" at 173.952,174.032 h1
D2: Top Overlay "+" at 145.849,117.024 h1
D3: Top Overlay "+" at 161.829,117.024 h1
D4: Top Overlay "+" at 177.809,117.024 h1
J0: Top Overlay "1" at 59.8,217.93 h0.9 r270; Top Overlay "8" at 59.8,200.13 h0.9 r270
J1: Top Overlay "1" at 59.8,188.289 h0.9 r270; Top Overlay "8" at 59.8,170.489 h0.9 r270
J2: Top Overlay "1" at 54.45,141.211 h0.9 r90; Top Overlay "8" at 54.45,159.011 h0.9 r90
J3: Top Overlay "1" at 54.45,111.57 h0.9 r90; Top Overlay "8" at 54.45,129.37 h0.9 r90
J5: Top Overlay "1" at 54.7,94.6 h0.9 r90; Top Overlay "4" at 54.8,102 h0.9 r90
LedTest1: Top Overlay "+" at 92.976,144.309 h1 r90
Q1: Top Overlay "C" at 130.194,187.787 h0.76; Top Overlay "B" at 128.848,188.397 h0.76; Top Overlay "E" at 127.501,187.787 h0.76
Q2: Top Overlay "C" at 123.194,187.787 h0.76; Top Overlay "B" at 121.848,188.397 h0.76; Top Overlay "E" at 120.501,187.787 h0.76
Q3: Top Overlay "C" at 116.194,187.787 h0.76; Top Overlay "B" at 114.848,188.397 h0.76; Top Overlay "E" at 113.501,187.787 h0.76
Q4: Top Overlay "C" at 109.194,187.787 h0.76; Top Overlay "B" at 107.848,188.397 h0.76; Top Overlay "E" at 106.501,187.787 h0.76
Q5: Top Overlay "C" at 87.924,96.787 h0.76; Top Overlay "B" at 86.578,97.397 h0.76; Top Overlay "E" at 85.231,96.787 h0.76
Q6: Top Overlay "C" at 116.424,165.787 h0.76; Top Overlay "B" at 115.078,166.397 h0.76; Top Overlay "E" at 113.731,165.787 h0.76
Q7: Top Overlay "C" at 125.347,165.787 h0.76; Top Overlay "B" at 124.001,166.397 h0.76; Top Overlay "E" at 122.655,165.787 h0.76
Q8: Top Overlay "C" at 134.27,165.787 h0.76; Top Overlay "B" at 132.924,166.397 h0.76; Top Overlay "E" at 131.578,165.787 h0.76
Q9: Top Overlay "C" at 143.194,165.787 h0.76; Top Overlay "B" at 141.848,166.397 h0.76; Top Overlay "E" at 140.501,165.787 h0.76
Q11: Top Overlay "C" at 150.362,127.787 h0.76; Top Overlay "B" at 149.016,128.397 h0.76; Top Overlay "E" at 147.67,127.787 h0.76
Q12: Top Overlay "C" at 158.445,127.787 h0.76; Top Overlay "B" at 157.099,128.397 h0.76; Top Overlay "E" at 155.753,127.787 h0.76
Q13: Top Overlay "C" at 182.694,125.787 h0.76; Top Overlay "B" at 181.348,126.397 h0.76; Top Overlay "E" at 180.001,125.787 h0.76
Q_LED_TEST1: Top Overlay "C" at 101.694,157.287 h0.76; Top Overlay "B" at 100.348,157.897 h0.76; Top Overlay "E" at 99.001,157.287 h0.76
SP1: Top Overlay "3" at 73.86,86 h0.9; Top Overlay "1" at 68.46,85.8 h0.9
SP2: Top Overlay "3" at 88.9,86 h0.9; Top Overlay "1" at 83.5,85.8 h0.9
SP3: Top Overlay "3" at 103.36,86 h0.9; Top Overlay "1" at 97.96,85.8 h0.9
Y1: Top Overlay "7" at 117.631,221.948 h1.52; Top Overlay "1" at 102.111,222.024 h1.52